# EAGLE board pico-glitcher-v1 v87 (EAGLE 9.7.0)
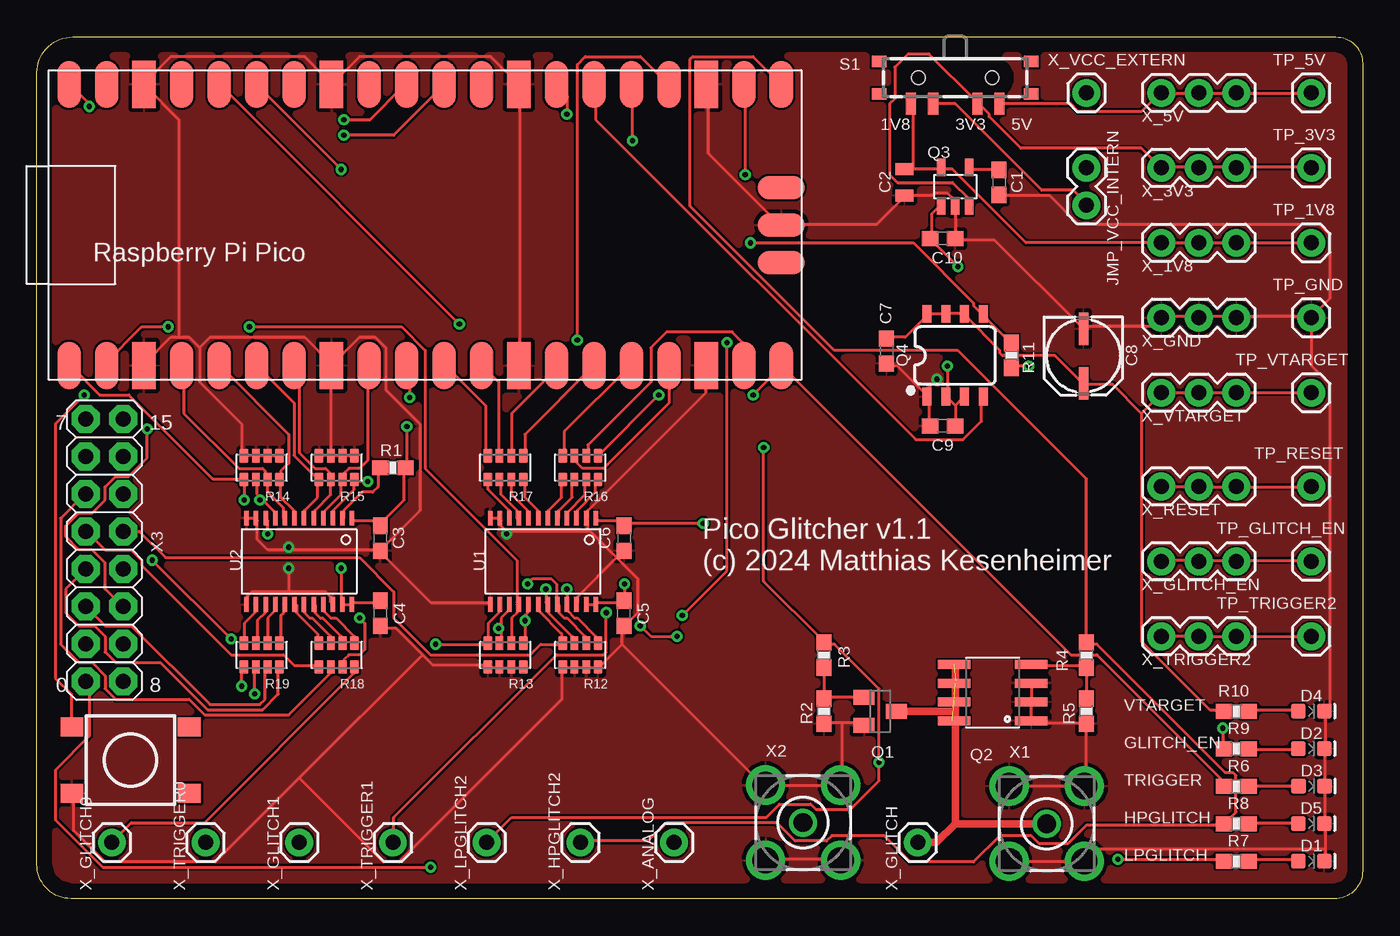
[diagram p0: board, top side]
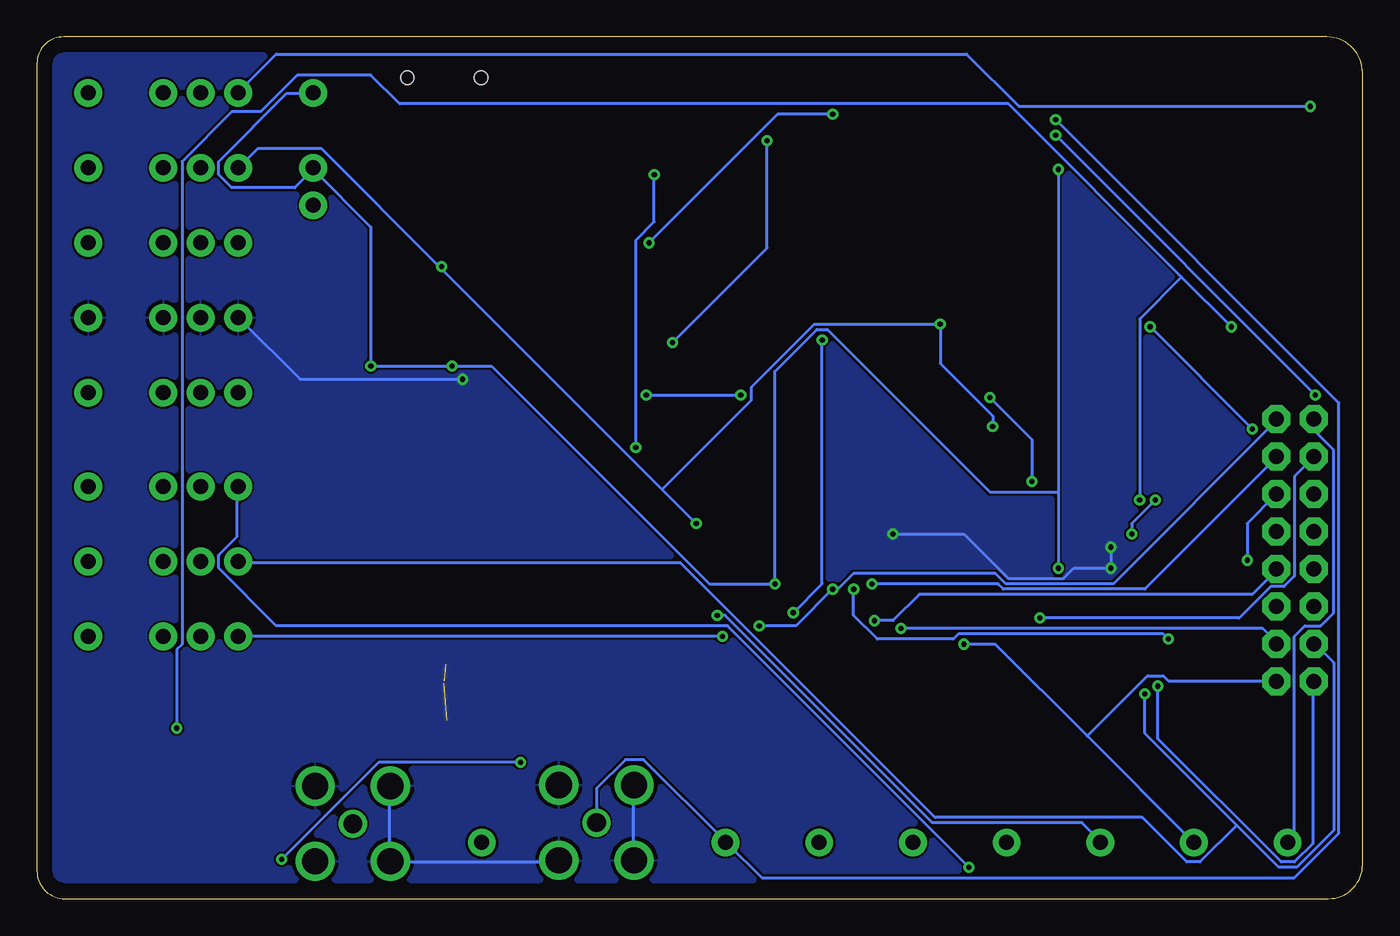
[diagram p1: board, bottom side, seen from below]

Size 89.84 x 58.41 mm. Coordinates in mm from the lower left corner, seen from the top.
Outline: 0,55.98 arc-90 2.43,58.41 88.04,58.41 arc-90 89.84,56.61 89.84,1.89 arc-90 87.95,0 2.32,0 arc-90 0,2.32 0,55.98
Copper layers (1*16): Top / Bottom
Stack-up Default Layer Stack: Top User Defined 0.035mm / Dielectric-1 User Defined 1.5mm / Bottom User Defined 0.035mm
Design rules: minimum drill size 0.35mm, minimum copper width 8mil, keepout clearance 0mil, drill distance 6mil, via restrict clearance 0mil, dimension clearance 40mil, restrict clearance 0mil, copper clearance wire_polygon to wire_polygon 6mil, copper clearance wire_polygon to pad_smd 6mil, copper clearance wire_polygon to via 6mil, copper clearance pad_smd to pad_smd 6mil, copper clearance pad_smd to via 6mil, copper clearance via to via 6mil, copper clearance smd to pad (same net) 6mil, copper clearance smd to via (same net) 6mil, copper clearance smd to smd (same net) 6mil

## Footprints (pad centres in the part's own frame; a part is rotated, then mirrored left to right if it is on the bottom)
0603 = smd 1.1 x 1: 1 -0.85,0; 2 0.85,0
0805 = smd 0.8 x 1.2: 1 -0.9,0; 2 0.9,0
PANASONIC_C = smd 2.2 x 0.65: + 1.9,-0.2; - -1.8,-0.2
LED-0603 = smd 1 x 1: A -0.877,0; C 0.877,0
1X02 = drill 1.016 pad 1.88: 1 0,0; 2 2.54,0
RPI_PICO = smd 3.2 x 1.6: 3V3 9.525,13.97; 3V3_EN 9.525,16.51; ADC_VREF 9.525,11.43; AGND 9.525,6.35; GND@1 -9.525,19.05; GND@2 -9.525,6.35; GND@3 -9.525,-6.35; GND@4 -9.525,-19.05; GND@6 9.525,-19.05; GND@7 9.525,-6.35; GND@8 9.525,19.05; GP0 -9.525,24.13; GP1 -9.525,21.59; GP2 -9.525,16.51; GP3 -9.525,13.97; GP4 -9.525,11.43; GP5 -9.525,8.89; GP6 -9.525,3.81; GP7 -9.525,1.27; GP8 -9.525,-1.27; GP9 -9.525,-3.81; GP10 -9.525,-8.89; GP11 -9.525,-11.43; GP12 -9.525,-13.97; GP13 -9.525,-16.51; GP14 -9.525,-21.59; GP15 -9.525,-24.13; GP16 9.525,-24.13; GP17 9.525,-21.59; GP18 9.525,-16.51; GP19 9.525,-13.97; GP20 9.525,-11.43; GP21 9.525,-8.89; GP22 9.525,-3.81; GP26_A0 9.525,1.27; GP27_A1 9.525,3.81; GP28_A2 9.525,8.89; RUN 9.525,-1.27; VBUS 9.525,24.13; VSYS 9.525,21.59 | smd 1.6 x 3.2: GND@5 0,-24.13; SWCLK -2.54,-24.13; SWDIO 2.54,-24.13
SOT23 = smd 1 x 1.4: 1 -0.95,-1.1; 2 0.95,-1.1; 3 0,1.1
SO08 = smd 0.61 x 2.21: 1 -1.905,-2.616; 2 -0.635,-2.616; 3 0.635,-2.616; 4 1.905,-2.616; 5 1.905,2.616; 6 0.635,2.616; 7 -0.635,2.616; 8 -1.905,2.616
SOT23-5L = smd 0.55 x 1.2: 1 -0.95,-1.3; 2 0,-1.3; 3 0.95,-1.3; 4 0.95,1.3; 5 -0.95,1.3
SO08' = smd 0.6 x 1.2: 1 -1.905,-2.8; 2 -0.635,-2.8; 3 0.635,-2.8; 4 1.905,-2.8; 5 1.905,2.8; 6 0.635,2.8; 7 -0.635,2.8; 8 -1.905,2.8
0603-RES = smd 1.1 x 1: 1 -0.85,0; 2 0.85,0
742C083103JP = smd 0.59 x 0.92: 1 -1.2,-0.8; 2 -0.4,-0.8; 3 0.4,-0.8; 4 1.2,-0.8; 5 1.2,0.8; 6 0.4,0.8; 7 -0.4,0.8; 8 -1.2,0.8
SWITCH-SP3T-SMD = smd 0.7 x 1.5: 1 3,-1.75; 2 1.5,-1.75; 3 -1.5,-1.75; 4 -3,-1.75 | smd 1 x 0.8: P$1 -5.15,-1.1; P$2 -5.15,1.1; P$3 5.15,1.1; P$4 5.15,-1.1 | hole 0.9: 2.5,0; -2.5,0
TACTILE_SWITCH_TALL = smd 1.55 x 1.3: A1 -3.975,-2.25; A2 3.975,-2.25; B1 -3.975,2.25; B2 3.975,2.25
1X01 = drill 1.016 pad 1.88: 1 0,0
TSSOP24 = smd 0.305 x 0.991: 1 -3.575,-2.918; 2 -2.925,-2.918; 3 -2.275,-2.918; 4 -1.625,-2.918; 5 -0.975,-2.918; 6 -0.325,-2.918; 7 0.325,-2.918; 8 0.975,-2.918; 9 1.625,-2.918; 10 2.275,-2.918; 11 2.925,-2.918; 12 3.575,-2.918; 13 3.575,2.918; 14 2.925,2.918; 15 2.275,2.918; 16 1.625,2.918; 17 0.975,2.918; 18 0.325,2.918; 19 -0.325,2.918; 20 -0.975,2.918; 21 -1.625,2.918; 22 -2.275,2.918; 23 -2.925,2.918; 24 -3.575,2.918
BU-SMA-V = drill 1.27: 1 0,0 | drill 1.778: 2 -2.55,2.55; 3 2.55,2.55; 4 2.55,-2.55; 5 -2.55,-2.55
2X8 = drill 1.016 pad 1.88 octagon: 1 0,0; 2 0,2.54; 3 2.54,0; 4 2.54,2.54; 5 5.08,0; 6 5.08,2.54; 7 7.62,0; 8 7.62,2.54; 9 10.16,0; 10 10.16,2.54; 11 12.7,0; 12 12.7,2.54; 13 15.24,0; 14 15.24,2.54; 15 17.78,0; 16 17.78,2.54
1X03 = drill 1.016 pad 1.88: 1 0,0; 2 2.54,0; 3 5.08,0

## Placement (x,y rotation side)
C1  0.01uF  [0603]  65.19,48.55 270 top
C2  2.2u  [0805]  58.79,48.55 270 top
C3  0.1uF  [0603]  23.28,24.42 270 top
C4  0.1uF  [0603]  23.28,19.34 90 top
C5  0.1uF  [0603]  39.79,19.34 90 top
C6  0.1uF  [0603]  39.79,24.42 270 top
C7  0.1uF  [0603]  57.57,37.12 270 top
C8  22uF  [PANASONIC_C]  71.12,36.83 270 top
C9  0.1uF  [0603]  61.38,32.04 0 top
C10  0.1uF  [0603]  61.38,44.74 0 top
D1  LED_RED_LPGLITCH  [LED-0603]  86.36,2.54 0 top
D2  LED_BLUE_GLITCH_EN  [LED-0603]  86.36,10.16 0 top
D3  LED_BLUE_TRIGGER2  [LED-0603]  86.37,7.62 0 top
D4  LED_RED_TARGET_POWER  [LED-0603]  86.36,12.7 0 top
D5  LED_RED_HPGLITCH  [LED-0603]  86.36,5.08 0 top
JMP_VCC_INTERN  JMP_VCC_INTERN  [1X02]  71.12,49.53 270 top
PICO  Raspberry Pi  [RPI_PICO]  26.31,45.66 90 top
Q1  IRLML2502  [SOT23]  57.15,12.7 270 top
Q2  IRF7807PBF  [SO08]  64.77,13.97 90 top
Q3  TPS 79318  [SOT23-5L]  62.23,48.26 0 top
Q4  TPS2041  [SO08']  62.23,36.83 0 top
R1  10K  [0603-RES]  24.13,29.21 0 top
R2  10K  [0603-RES]  53.34,12.7 90 top
R3  1R  [0603-RES]  53.34,16.51 90 top
R4  1R  [0603-RES]  71.12,16.51 90 top
R5  10K  [0603-RES]  71.12,12.7 90 top
R6  168  [0603-RES]  81.28,10.16 180 top
R7  168  [0603-RES]  81.28,2.54 180 top
R8  168  [0603-RES]  81.28,7.62 180 top
R9  220  [0603-RES]  81.28,12.7 180 top
R10  168  [0603-RES]  81.28,5.08 180 top
R11  10K  [0603-RES]  66.04,36.83 270 top
R12  10k  [742C083103JP]  36.83,16.51 180 top
R13  10k  [742C083103JP]  31.75,16.51 180 top
R14  10k  [742C083103JP]  15.24,29.21 180 top
R15  10k  [742C083103JP]  20.32,29.21 180 top
R16  100  [742C083103JP]  36.83,29.21 180 top
R17  100  [742C083103JP]  31.75,29.21 180 top
R18  100  [742C083103JP]  20.32,16.51 180 top
R19  100  [742C083103JP]  15.24,16.51 180 top
S1  Micro Slide Switch  [SWITCH-SP3T-SMD]  62.23,55.64 0 top
S_RST  SWITCH-MOMENTARY-2  [TACTILE_SWITCH_TALL]  6.35,9.39 180 top
TP_1V8  PINHDR_1X1  [1X01]  86.36,44.45 0 top
TP_3V3  PINHDR_1X1  [1X01]  86.36,49.53 0 top
TP_5V  M01PTH  [1X01]  86.36,54.61 0 top
TP_GLITCH_EN  PINHDR_1X1  [1X01]  86.36,22.86 0 top
TP_GND  PINHDR_1X1  [1X01]  86.36,39.37 0 top
TP_RESET  PINHDR_1X1  [1X01]  86.36,27.94 0 top
TP_TRIGGER2  PINHDR_1X1  [1X01]  86.36,17.78 0 top
TP_VTARGET  PINHDR_1X1  [1X01]  86.36,34.29 0 top
U1  NH245  [TSSOP24]  34.29,22.86 180 top
U2  NH245  [TSSOP24]  17.78,22.86 180 top
X1  BU-SMA-V  [BU-SMA-V]  68.43,5.08 0 top
X2  BU-SMA-V  [BU-SMA-V]  51.92,5.15 0 top
X3  M08X2  [2X8]  3.3,32.51 270 top
X_1V8  PINHDR_3X1  [1X03]  76.2,44.45 0 top
X_3V3  PINHDR_3X1  [1X03]  76.2,49.53 0 top
X_5V  PINHDR_3X1  [1X03]  76.2,54.61 0 top
X_ANALOG  PINHDR_1X1  [1X01]  43.18,3.81 0 top
X_GLITCH  PINHDR_1X1  [1X01]  59.69,3.81 0 top
X_GLITCH0  PINHDR_1X1  [1X01]  5.08,3.81 0 top
X_GLITCH1  PINHDR_1X1  [1X01]  17.78,3.81 0 top
X_GLITCH_EN  PINHDR_3X1  [1X03]  76.2,22.86 0 top
X_GND  PINHDR_3X1  [1X03]  76.2,39.37 0 top
X_HPGLITCH2  PINHDR_1X1  [1X01]  36.83,3.81 0 top
X_LPGLITCH2  PINHDR_1X1  [1X01]  30.48,3.81 0 top
X_RESET  PINHDR_3X1  [1X03]  76.2,27.94 0 top
X_TRIGGER0  PINHDR_1X1  [1X01]  11.43,3.81 0 top
X_TRIGGER1  PINHDR_1X1  [1X01]  24.13,3.81 0 top
X_TRIGGER2  PINHDR_3X1  [1X03]  76.2,17.78 0 top
X_VCC_EXTERN  PINHDR_1X1  [1X01]  71.12,54.61 0 top
X_VTARGET  PINHDR_3X1  [1X03]  76.2,34.29 0 top

## Library data of the parts
C1 = SparkFun-Capacitors; PROD_ID: CAP-16503; VALUE: 0.1uF
C2 = SparkFun-Capacitors
C3-C7 C9 C10 = SparkFun-Capacitors; PROD_ID: CAP-16503
C8 = SparkFun-Capacitors; PROD_ID: CAP-08618
D1-D5 = SparkFun-LED
JMP_VCC_INTERN TP_1V8 TP_3V3 TP_5V TP_GLITCH_EN TP_GND TP_RESET TP_TRIGGER2 TP_VTARGET X3 X_1V8 X_3V3 X_5V X_ANALOG X_GLITCH X_GLITCH0 X_GLITCH1 X_GLITCH_EN X_GND X_HPGLITCH2 X_LPGLITCH2 X_RESET X_TRIGGER0 X_TRIGGER1 X_TRIGGER2 X_VCC_EXTERN X_VTARGET = SparkFun-Connectors
PICO = RaspberryPi_Pico
Q1 = Transistor; CATEGORY: Transistor; SUB-CATEGORY: MOSFET; TYPE: N-Channel
Q2 S1 S_RST = SparkFun
Q3 = tps769xx
Q4 = TPS2041
R1-R11 = SparkFun-Resistors; PROD_ID: RES-00824
R12-R19 = Resistor Array; CREATED_BY: PCBLayout.com; DIGIKEY_PN: 742C083103JPTR-ND; MANUFACTURER: CTS Resistor Products; MPN: 742C083103JP; PACKAGE: 1206
U1 U2 = TI_NH245_SN74LVC8T245
X1 X2 = con-coax; OC_FARNELL: unknown; OC_NEWARK: unknown

## Nets
+1V8: C2.1 Q3.5 S1.4 TP_1V8.1 X_1V8.1 X_1V8.2 X_1V8.3
+3V3: C3.1 C6.1 C10.1 PICO.3V3 Q3.1 Q3.3 R1.2 S1.2 TP_3V3.1 U1.1 U2.1 X_3V3.1 X_3V3.2 X_3V3.3
+5V: PICO.VBUS S1.1 TP_5V.1 X_5V.1 X_5V.2 X_5V.3
ANALOG: PICO.GP26_A0 X2.1 X_ANALOG.1
GLITCH: Q1.3 Q2.5 Q2.6 Q2.7 Q2.8 X1.1 X_GLITCH.1
GND: C1.2 C2.2 C3.2 C4.1 C5.1 C6.2 C7.2 C8.- C9.1 C10.2 D1.C D2.C D3.C D4.C D5.C PICO.AGND PICO.GND@1 PICO.GND@2 PICO.GND@3 PICO.GND@4 PICO.GND@5 PICO.GND@6 PICO.GND@7 PICO.GND@8 Q1.2 Q2.1 Q2.2 Q2.3 Q3.2 Q4.1 R2.1 R5.1 R12.5 R12.6 R12.7 R12.8 R13.5 R13.6 R13.7 R13.8 R14.1 R14.2 R14.3 R14.4 R15.1 R15.2 R15.3 R15.4 S_RST.B2 TP_GND.1 U1.2 U1.11 U1.12 U1.13 U1.22 U2.11 U2.12 U2.13 U2.22 X1.2 X1.3 X1.4 X1.5 X2.2 X2.3 X2.4 X2.5 X_GND.1 X_GND.2 X_GND.3
GP0: PICO.GP0 R14.5 U2.10
GP1: PICO.GP1 R6.2 R14.6 U2.9
GP2: PICO.GP2 R14.7 U2.8
GP3: PICO.GP3 R14.8 U2.7
GP4: PICO.GP4 R15.5 U2.6
GP5: PICO.GP5 R15.6 U2.5
GP6: PICO.GP6 R15.7 U2.4
GP7: PICO.GP7 R15.8 U2.3
GP8: PICO.GP8 R17.4
GP9: PICO.GP9 R17.3
GP10: PICO.GP10 R17.2
GP11: PICO.GP11 R17.1
GP12: PICO.GP12 R16.4
GP13: PICO.GP13 R16.3
GP14: PICO.GP14 R16.2
GP15: PICO.GP15 R8.2 R16.1
HPGLITCH2: PICO.GP16 R4.2 R10.2 X_HPGLITCH2.1
JVCC: JMP_VCC_INTERN.2 S1.3
LPGLITCH2: PICO.GP17 R3.2 R7.2 X_LPGLITCH2.1
N$1: D3.A R8.1
N$2: D1.A R7.1
N$3: Q1.1 R2.2 R3.1
N$4: D2.A R6.1
N$5: Q2.4 R4.1 R5.2
N$6: D4.A R9.1
N$7: D5.A R10.1
N$8: C1.1 Q3.4
N$9: R18.1 U2.21
N$10: R18.2 U2.20
N$11: R18.3 U2.19
N$12: R18.4 U2.18
N$13: R19.1 U2.17
N$14: R19.2 U2.16
N$15: R19.3 U2.15
N$16: R19.4 U2.14
N$17: R16.8 U1.3
N$18: R16.7 U1.4
N$19: R16.6 U1.5
N$20: R16.5 U1.6
N$21: R17.8 U1.7
N$22: R17.7 U1.8
N$23: R17.6 U1.9
N$24: R17.5 U1.10
N$26: R12.1 TP_TRIGGER2.1 U1.21 X3.2 X_TRIGGER2.1 X_TRIGGER2.2 X_TRIGGER2.3
N$33: R1.1 U2.2
N$34: PICO.RUN S_RST.A2
N$37: PICO.GP19 X_GLITCH1.1
N$38: R19.5 TP_RESET.1 X3.15 X_RESET.1 X_RESET.2 X_RESET.3
N$39: R19.6 TP_GLITCH_EN.1 X3.13 X_GLITCH_EN.1 X_GLITCH_EN.2 X_GLITCH_EN.3
N$40: R19.7 X3.11
N$41: R19.8 X3.9
N$42: R18.5 X3.7
N$43: R18.6 X3.5
N$44: R18.7 X3.3
N$45: R18.8 X3.1 X_GLITCH0.1
N$47: R12.2 U1.20 X3.4
N$48: R12.3 U1.19 X3.6
N$49: R12.4 U1.18 X3.8
N$50: R13.1 U1.17 X3.10
N$51: R13.2 U1.16 X3.12
N$52: R13.3 U1.15 X3.14
N$53: R13.4 U1.14 X3.16 X_TRIGGER0.1
N$54: PICO.GP18 X_TRIGGER1.1
VCC: C4.2 C5.2 C9.2 JMP_VCC_INTERN.1 PICO.ADC_VREF Q4.2 Q4.3 R11.2 U1.23 U1.24 U2.23 U2.24 X_VCC_EXTERN.1
VTARGET: C7.1 C8.+ Q4.6 Q4.7 Q4.8 R9.2 TP_VTARGET.1 X_VTARGET.1 X_VTARGET.2 X_VTARGET.3
VTARGET_EN: PICO.GP20 Q4.4
VTARGET_OC: PICO.GP21 Q4.5 R11.1

## Tracks (layer width: path | path; a pad name or v marks a point on that pad's centre or on a via)
+1V8
  Top 0.203: 59.38,49.43 61.16,49.43 Q3.5 61.34,49.43 62.05,49.43 67.03,44.45 X_1V8.1 X_1V8.2 X_1V8.3 TP_1V8.1 | 59.38,49.43 58.85,49.43 C2.1 59.38,49.43 | 59.38,49.43 59.38,53.87 S1.4
+3V3  (via drill 0.35)
  Top 0.203: Q3.3 63.12,47.12 63.12,47.47 62.05,48.54 58.32,48.54 57.78,49.07 57.78,53.87 58.14,54.23 58.14,56.36 59.03,57.25 60.45,57.25 63.65,54.05 S1.2 63.83,53.87 64.54,53.16 64.54,52.98 66.67,50.85 74.85,50.85 76.1,49.61 X_3V3.1 76.28,49.61 78.59,49.61 X_3V3.2 78.77,49.61 81.25,49.61 X_3V3.3 81.43,49.61 86.23,49.61 TP_3V3.1 | U2.1 21.34,25.6 22.94,25.6 23.11,25.43 C3.1 23.29,25.43 24.89,27.03 24.89,29.16 R1.2 25.07,29.34 v25.07,32 | Q3.1 61.16,46.94 60.63,46.41 60.63,44.81 C10.1 60.63,44.63 v62.41,42.85 | U1.1 37.87,25.6 39.47,25.6 39.65,25.43 C6.1 39.83,25.43 v45.16,25.43 | v28.63,38.94 12.45,55.12 PICO.3V3
  Bottom 0.203: 62.59,42.85 70.59,50.85 74.85,50.85 76.1,49.61 X_3V3.1 | 62.59,42.85 47.47,27.74 | 47.47,27.74 v45.16,25.43 | 62.59,42.85 v62.41,42.85 | 47.47,27.74 41.43,33.78 41.43,34.67 37.16,38.94 v28.63,38.94 28.63,36.27 25.07,32.72 v25.07,32
+5V  (via drill 0.35)
  Top 0.203: S1.1 65.25,53.87 70.05,53.87 70.59,53.34 74.85,53.34 76.1,54.59 X_5V.1 76.28,54.59 78.59,54.59 X_5V.2 78.77,54.59 81.25,54.59 X_5V.3 81.43,54.59 86.23,54.59 TP_5V.1 | v3.56,53.7 3.56,53.87 2.31,55.12 PICO.VBUS
  Bottom 0.203: v3.56,53.7 23.29,53.7 26.85,57.25 73.61,57.25 76.1,54.76 X_5V.1
ANALOG  (via drill 0.35)
  Top 0.203: v20.8,52.81 22.58,52.81 24.89,55.12 PICO.GP26_A0
  Bottom 0.203: v20.8,52.81 1.6,33.6 1.6,4.45 4.62,1.42 40.72,1.42 43.03,3.73 X_ANALOG.1 43.2,3.91 48.72,9.42 49.96,9.42 51.92,7.47 X2.1
GLITCH  (3 unrouted)
  Top 0.203: 62.23,14.76 Q2.6 62.23,14.58 | 62.23,15.82 Q2.5 | 58.32,12.8 Q1.3 | 62.05,13.34 Q2.7 62.23,13.34 | 62.05,12.09 Q2.8 | 68.28,5.16 X1.1
  Top 0.508: Q1.3 62.23,12.7 | 62.23,12.7 62.23,15.82 | 62.23,12.7 62.23,5.08 | 62.23,5.08 60.96,3.81 X_GLITCH.1 | X1.1 62.23,5.08
GND  (via drill 0.35)
  Top 0.203: C1.2 65.25,47.65 68.63,47.65 70.59,45.7 86.94,45.7 87.66,44.98 87.66,40.72 86.41,39.47 TP_GND.1 | PICO.GND@6 45.52,55.12 45.52,50.49 50.32,45.7 PICO.GND@5 50.49,45.7 56.9,45.7 58.67,47.47 C2.2 58.85,47.65 60.63,47.65 60.81,47.83 61.7,47.83 62.23,47.3 Q3.2 C10.2 62.23,44.63 64.9,44.63 70.76,38.76 C8.- 70.94,38.76 75.56,38.76 76.1,39.29 X_GND.1 76.28,39.47 78.59,39.47 X_GND.2 78.77,39.47 81.25,39.47 X_GND.3 81.43,39.47 86.23,39.47 TP_GND.1 | C9.1 60.45,32.18 60.45,33.96 Q4.1 | 60.1,34.31 60.27,34.14 Q4.1 | 60.1,34.31 58.32,36.09 57.61,36.09 C7.2 | v60.98,35.2 60.1,34.31 | 60.1,34.31 Q4.1 | 17.07,20.8 19.56,20.8 19.91,20.45 19.91,20.09 U2.22 | 17.07,20.8 14.58,20.8 14.22,20.45 14.22,20.09 U2.13 | U2.12 14.22,25.78 14.76,25.78 U2.11 14.94,25.6 14.94,24.36 15.65,23.65 17.07,23.65 | U1.13 30.58,20.09 26.67,20.09 23.29,23.47 C3.2 | 17.07,23.65 23.11,23.65 C3.2 | v17.07,22.4 17.07,20.8 | 17.07,23.65 v17.07,23.82 | 19.91,30.05 19.2,30.05 R15.4 | R15.1 21.51,30.05 20.8,30.05 R15.2 20.62,30.05 20.09,30.05 R15.3 19.91,30.05 | 19.91,30.05 19.91,36.09 PICO.GND@2 | R14.1 16.36,30.05 15.65,30.05 R14.2 15.47,30.05 14.94,30.05 R14.3 14.76,30.05 14.05,30.05 R14.4 13.87,30.05 13.87,32.18 11.02,35.03 11.02,37.34 | 11.02,37.34 10.31,38.05 9.6,38.05 | 9.6,38.05 9.07,38.05 7.29,36.27 PICO.GND@1 | 11.02,37.34 11.73,38.05 18.14,38.05 19.91,36.27 PICO.GND@2 | C3.2 23.29,23.65 25.96,26.31 25.96,32.18 23.65,34.49 23.65,37.34 22.94,38.05 21.87,38.05 20.09,36.27 PICO.GND@2 | PICO.GND@3 32.72,36.27 32.72,55.12 PICO.GND@7 32.54,55.3 30.76,57.07 21.87,57.07 20.09,55.3 PICO.AGND 19.91,55.3 18.14,57.07 9.07,57.07 7.29,55.3 PICO.GND@8 7.29,55.12 9.6,52.81 9.6,38.05
  Top 0.203: R13.8 32.89,15.65 32.18,15.65 R13.7 32,15.65 31.47,15.65 R13.6 31.29,15.65 30.58,15.65 R13.5 30.4,15.82 26.85,15.82 26.14,16.54 | 26.14,16.54 24.36,18.31 23.29,18.31 C4.1 | 26.14,16.54 17.78,8.18 | 17.78,8.18 12.09,2.49 4.62,2.49 2.49,4.62 2.49,7.11 S_RST.B2 | 39.65,17.25 39.65,18.31 C5.1 39.83,18.49 40.72,19.38 40.72,21.69 39.29,23.11 | 39.65,17.25 38.05,15.65 R12.8 37.87,15.65 37.34,15.65 R12.7 37.16,15.65 36.45,15.65 R12.6 36.27,15.65 35.74,15.65 R12.5 35.56,15.65 35.56,13.51 24.54,2.49 23.47,2.49 17.78,8.18 | U1.12 30.76,25.78 31.29,25.78 U1.11 31.47,25.6 31.47,25.25 31.83,24.89 | 39.29,23.11 39.65,23.47 C6.2 39.29,23.11 | 39.29,23.11 36.63,20.45 36.63,20.09 U1.22 | 39.29,23.11 37.52,24.89 | 37.52,24.89 37.34,25.07 37.34,25.6 U1.2 37.34,25.78 37.34,26.31 45.34,34.31 45.34,36.09 PICO.GND@4 | 37.52,24.89 31.83,24.89 | X2.5 49.43,2.67 54.41,2.67 X2.4 | 54.59,11.91 56.01,11.91 Q1.2 | 54.59,11.91 53.34,11.91 R2.1 | 54.59,11.91 54.59,7.82 X2.3 54.41,7.64 49.43,7.64 X2.2 49.25,7.64 39.65,17.25 | Q2.3 Q2.2 Q2.1 67.39,11.91 71.12,11.91 R5.1 71.12,7.64 X1.3 70.94,7.64 65.96,7.64 X1.2 | 87.3,3.38 87.3,4.98 D5.C 87.3,5.16 87.3,7.47 D3.C 87.3,7.64 87.3,10.13 D2.C 87.3,10.31 87.3,12.62 D4.C 87.3,12.8 87.66,13.16 87.66,34.85 86.41,36.09 86.41,39.29 TP_GND.1 | 87.3,3.38 87.3,2.67 D1.C | 87.3,3.38 71.83,3.38 71.12,2.67 X1.4 70.94,2.49 65.96,2.49 X1.5 | 31.83,24.89 v31.83,24.71
  Bottom 0.203: v60.98,35.2 72.01,35.2 76.1,39.29 X_GND.1 | v17.07,23.82 v17.07,22.4 19.56,22.4 20.27,21.69 24,21.69 27.03,24.71 v31.83,24.71 | X2.5 49.43,2.67 49.43,7.64 X2.2 | X1.2 65.96,7.47 65.96,2.67 X1.5 65.79,2.49 54.59,2.49 X2.4
  pour Top: 0,58.42 90.17,58.42 90.17,0 0,0
  pour Bottom: 0,58.42 90.17,58.42 90.17,0 0,0
GP0  (via drill 0.35)
  Top 0.203: PICO.GP0 2.31,36.09 4.27,34.14 6.22,34.14 11.91,28.45 13.87,28.45 R14.5 14.05,28.27 v14.05,27.03 | v15.65,24.71 15.65,25.6 U2.10
  Bottom 0.203: v15.65,24.71 15.65,25.43 v14.05,27.03
GP1  (via drill 0.35)
  Top 0.203: 15.29,27.03 16.18,26.14 16.18,25.78 U2.9 | 15.29,27.03 14.94,27.38 14.94,28.27 R14.6 | v80.37,11.56 80.37,10.31 R6.2 | v8.89,38.76 7.11,38.76 4.62,36.27 PICO.GP1 | v15.11,27.03 15.29,27.03
  Bottom 0.203: v80.37,11.56 80.37,16.89 80.01,17.25 80.01,49.96 76.63,53.34 74.68,53.34 72.19,55.83 67.21,55.83 65.25,53.87 24,53.87 12.27,42.14 | v8.89,38.76 12.27,42.14 | v15.11,27.03 15.11,39.29 12.27,42.14
GP2
  Top 0.203: U2.8 16.71,25.78 16.71,26.49 15.65,27.56 15.65,28.27 R14.7 15.47,28.45 15.47,28.98 15.29,29.16 13.69,29.16 9.96,32.89 9.96,36.09 PICO.GP2
GP3
  Top 0.203: U2.7 17.42,25.78 17.42,26.31 16.54,27.2 16.54,28.27 R14.8 16.54,28.45 16.54,28.98 17.07,29.52 17.07,31.47 12.45,36.09 PICO.GP3
GP4
  Top 0.203: U2.6 18.14,25.78 18.14,26.31 19.02,27.2 19.02,28.27 R15.5 19.02,28.45 17.42,30.05 17.42,33.6 14.94,36.09 PICO.GP4
GP5
  Top 0.203: U2.5 18.85,25.78 18.85,26.31 19.91,27.38 19.91,28.27 R15.6 19.91,28.45 19.91,28.8 19.56,29.16 18.85,29.16 17.78,30.23 17.78,35.74 17.42,36.09 PICO.GP5
GP6
  Top 0.203: U2.4 19.38,25.78 19.38,26.14 20.62,27.38 20.62,28.27 R15.7 20.8,28.45 20.8,28.8 21.16,29.16 21.87,29.16 22.4,29.69 22.4,36.09 PICO.GP6
GP7  (via drill 0.35)
  Top 0.203: U2.3 20.09,25.78 20.09,26.31 21.51,27.74 21.51,28.27 R15.8 21.69,28.27 v22.4,28.27 | v25.25,33.96 25.25,35.92 25.07,36.09 PICO.GP7
  Bottom 0.203: v22.4,28.27 22.4,31.11 v25.25,33.96
GP8
  Top 0.203: R17.4 30.4,30.05 30.4,33.43 27.74,36.09 PICO.GP8
GP9
  Top 0.203: R17.3 31.29,30.05 31.29,35.03 30.23,36.09 PICO.GP9
GP10
  Top 0.203: R17.2 32.18,30.05 32.18,32.89 35.03,35.74 35.03,36.09 PICO.GP10
GP11
  Top 0.203: R17.1 33.07,30.05 33.07,31.47 37.69,36.09 PICO.GP11
GP12
  Top 0.203: R16.4 35.74,30.05 35.74,31.65 40.18,36.09 PICO.GP12
GP13
  Top 0.203: R16.3 36.45,29.87 36.45,29.69 36.98,29.16 38.41,29.16 42.85,33.6 42.85,36.09 PICO.GP13
GP14
  Top 0.203: R16.2 37.34,30.05 37.34,30.76 41.6,35.03 41.6,37.34 42.67,38.41 47.12,38.41 47.83,37.69 47.83,36.27 PICO.GP14
GP15  (via drill 0.35)
  Top 0.203: v42.14,34.14 38.05,30.05 R16.1 | 50.49,36.09 v48.54,34.14 | 50.49,36.09 70.05,16.54 71.83,16.54 80.37,8 80.37,7.64 R8.2 | 50.49,36.09 PICO.GP15
  Bottom 0.203: v48.54,34.14 v42.14,34.14
HPGLITCH2
  Top 0.203: PICO.GP16 50.32,55.3 48.54,57.07 44.45,57.07 44.27,56.9 44.27,46.94 54.05,37.16 62.41,37.16 71.12,28.45 R4.2 71.12,17.25 71.83,17.25 80.54,8.53 81.08,8.53 81.25,8.36 81.25,5.87 80.54,5.16 R10.2 80.37,4.98 71.12,4.98 69.88,3.73 67.92,3.73 67.39,4.27 65.25,4.27 63.48,2.49 59.21,2.49 57.43,4.27 53.87,4.27 53.52,3.91 51.38,3.91 50.14,5.16 42.67,5.16 41.43,3.91 36.98,3.91 X_HPGLITCH2.1
JVCC
  Top 0.203: S1.3 60.81,53.87 62.23,53.87 68.1,48.01 70.23,48.01 71.12,47.12 JMP_VCC_INTERN.2
LPGLITCH2  (via drill 0.35)
  Top 0.203: X_LPGLITCH2.1 32.18,5.51 49.43,5.51 50.32,6.4 52.45,6.4 52.81,6.04 55.12,6.04 57.07,8 v57.07,9.25 57.07,14.22 54.05,17.25 53.34,17.25 R3.2 53.34,17.42 49.25,21.51 v49.25,30.58 | v73.25,2.67 80.37,2.67 R7.2 | v48.01,49.07 48.01,55.12 PICO.GP17
  Bottom 0.203: v73.25,2.67 66.67,9.25 v57.07,9.25 | v48.01,49.07 48.01,45.87 49.25,44.63 v49.25,30.58
N$1
  Top 0.203: D3.A 85.34,7.64 82.14,7.64 R8.1
N$2
  Top 0.203: D1.A 85.34,2.67 82.14,2.67 R7.1
N$3
  Top 0.203: R3.1 53.34,13.69 | 53.34,13.69 56.01,13.69 Q1.1 | 53.34,13.69 R2.2
N$4
  Top 0.203: D2.A 85.34,10.13 82.14,10.13 R6.1
N$5
  Top 0.203: R5.2 R4.1 71.12,15.82 67.39,15.82 Q2.4
N$6
  Top 0.203: D4.A 85.34,12.8 82.14,12.8 R9.1
N$7
  Top 0.203: D5.A 85.34,5.16 82.14,5.16 R10.1
N$8
  Top 0.203: C1.1 65.08,49.43 63.3,49.43 Q3.4
N$9
  Top 0.203: R18.1 21.51,17.42 21.51,17.78 20.27,19.02 19.91,19.02 19.38,19.56 19.38,19.91 U2.21
N$10
  Top 0.203: R18.2 20.62,17.42 20.62,17.78 19.38,19.02 19.2,19.02 18.85,19.38 18.85,19.91 U2.20
N$11
  Top 0.203: R18.3 19.91,17.42 19.91,17.78 18.67,19.02 18.49,19.02 18.14,19.38 18.14,19.91 U2.19
N$12
  Top 0.203: R18.4 19.02,17.42 19.02,17.96 17.6,19.38 17.6,19.91 U2.18
N$13
  Top 0.203: R19.1 16.54,17.42 16.54,19.2 16.71,19.38 16.71,19.91 U2.17
N$14
  Top 0.203: R19.2 15.65,17.42 15.65,19.02 16.18,19.56 16.18,19.91 U2.16
N$15
  Top 0.203: R19.3 14.94,17.42 14.94,18.85 15.47,19.38 15.47,19.91 U2.15
N$16
  Top 0.203: R19.4 14.05,17.42 14.05,18.67 14.76,19.38 14.76,19.91 U2.14
N$17
  Top 0.203: R16.8 37.87,28.27 37.87,27.56 36.63,26.31 36.63,25.78 U1.3
N$18
  Top 0.203: R16.7 37.16,28.27 37.16,27.38 35.92,26.14 U1.4
N$19
  Top 0.203: R16.6 36.27,28.27 36.27,27.2 35.38,26.31 35.38,25.78 U1.5
N$20
  Top 0.203: R16.5 35.56,28.27 35.56,27.2 34.67,26.31 34.67,25.78 U1.6
N$21
  Top 0.203: R17.8 33.07,28.27 33.07,27.2 33.96,26.31 U1.7
N$22
  Top 0.203: R17.7 32.18,28.27 32.18,27.38 33.25,26.31 33.25,25.78 U1.8
N$23
  Top 0.203: R17.6 31.47,28.27 31.47,27.38 32.54,26.31 32.54,25.78 U1.9
N$24
  Top 0.203: R17.5 30.58,28.27 30.58,27.74 32,26.31 32,25.78 U1.10
N$26  (via drill 0.35)
  Top 0.203: X_TRIGGER2.1 X_TRIGGER2.2 X_TRIGGER2.3 TP_TRIGGER2.1 | R12.1 37.87,17.42 37.87,17.78 36.63,19.02 36.45,19.02 35.92,19.56 35.92,19.91 U1.21 35.92,20.09 v35.92,20.98 | v43.38,17.78 41.6,17.78 v40.89,18.49
  Bottom 0.203: X3.2 5.87,32.36 16.89,21.34 24.18,21.34 24.89,22.05 34.49,22.05 35.56,20.98 v35.92,20.98 38.41,18.49 v40.89,18.49 | v43.38,17.78 X_TRIGGER2.1
N$33
  Top 0.203: U2.2 20.8,25.78 20.8,26.31 22.05,27.56 22.76,27.56 23.11,27.91 23.11,29.16 R1.1
N$34  (via drill 0.35)
  Top 0.203: v3.2,34.14 1.25,32.18 1.25,14.94 2.31,13.87 2.31,11.73 S_RST.A2 | v20.8,51.74 24.18,51.74 27.56,55.12 PICO.RUN
  Bottom 0.203: v20.8,51.74 v3.2,34.14
N$37  (via drill 0.35)
  Top 0.203: v40.36,51.38 40.36,55.12 PICO.GP19 | v46.76,37.69 46.76,22.23 v43.74,19.2
  Bottom 0.203: v40.36,51.38 40.36,44.09 v46.76,37.69 | v43.74,19.2 43.2,19.2 29.16,5.16 19.02,5.16 17.78,3.91 X_GLITCH1.1
N$38  (via drill 0.35)
  Top 0.203: X_RESET.1 76.28,27.91 78.59,27.91 X_RESET.2 78.77,27.91 81.25,27.91 X_RESET.3 81.43,27.91 86.23,27.91 TP_RESET.1 | v13.87,14.4 13.87,15.65 R19.5 | v26.67,2.13 4.45,2.13 1.25,5.33 1.25,8.71 3.56,11.02 3.56,14.4 3.38,14.58 X3.15
  Bottom 0.203: v13.87,14.4 13.87,10.85 5.51,2.49 4.62,2.49 3.38,3.73 3.38,14.58 X3.15 | v26.67,2.13 43.03,18.49 73.61,18.49 77.52,22.4 77.52,23.29 76.28,24.54 76.28,27.91 X_RESET.1
N$39  (via drill 0.35)
  Top 0.203: X_GLITCH_EN.1 76.28,22.94 78.59,22.94 X_GLITCH_EN.2 78.77,22.94 81.25,22.94 X_GLITCH_EN.3 81.43,22.94 86.23,22.94 TP_GLITCH_EN.1 | v14.76,13.87 14.76,15.65 R19.6
  Bottom 0.203: v14.76,13.87 14.76,11.2 8.53,4.98 | 8.53,4.98 5.69,2.13 4.45,2.13 1.96,4.62 1.96,16 3.2,17.25 X3.13 | 8.53,4.98 11.02,2.49 11.91,2.49 14.94,5.51 28.98,5.51 46.23,22.76 76.1,22.76 X_GLITCH_EN.1
N$40
  Top 0.203: R19.7 15.47,15.65 15.47,13.51 15.11,13.16 11.73,13.16 6.4,18.49 4.62,18.49 3.38,19.74 X3.11
N$41
  Top 0.203: R19.8 16.36,15.65 16.36,13.87 15.29,12.8 11.56,12.8 8.36,16 5.33,16 4.62,16.71 4.62,17.78 3.91,18.49 2.85,18.49 1.96,19.38 1.96,20.98 3.2,22.23 X3.9
N$42
  Top 0.203: R18.5 19.02,15.82 17.42,15.82 16.71,16.54 13.16,16.54 7.11,22.58 7.11,22.94 6.4,23.65 4.62,23.65 3.38,24.89 X3.7
N$43
  Top 0.203: R18.6 19.91,15.65 19.91,15.29 17.07,12.45 11.38,12.45 10.31,13.51 5.33,13.51 4.62,14.22 4.62,15.11 3.73,16 2.85,16 1.6,17.25 1.6,25.78 3.2,27.38 X3.5
N$44  (via drill 0.35)
  Top 0.203: v21.87,19.02 22.23,18.67 22.23,16.89 21.87,16.54 21.16,16.54 20.8,16.18 20.8,15.82 R18.7
  Bottom 0.203: v21.87,19.02 8.36,19.02 6.22,21.16 5.33,21.16 4.62,21.87 4.62,28.63 3.38,29.87 X3.3
N$45
  Top 0.203: R18.8 21.51,15.65 21.51,15.29 11.38,5.16 6.4,5.16 5.16,3.91 X_GLITCH0.1
  Bottom 0.203: X_GLITCH0.1 4.62,4.27 4.62,17.78 3.91,18.49 2.85,18.49 1.96,19.38 1.96,30.4 3.2,31.65 3.2,32.36 X3.1
N$47  (via drill 0.35)
  Top 0.203: R12.2 37.16,17.42 37.16,17.78 35.92,19.02 35.74,19.02 35.38,19.38 35.38,19.91 U1.20 35.2,20.09 35.2,21.34 34.85,21.69 33.6,21.69 v33.25,21.34
  Bottom 0.203: v33.25,21.34 24.71,21.34 24.36,20.98 14.76,20.98 5.87,29.87 X3.4
N$48  (via drill 0.35)
  Top 0.203: R12.3 36.27,17.42 36.27,17.78 34.67,19.38 34.67,19.91 U1.19 34.49,20.09 v34.49,20.98 | v7.82,22.94 v13.16,17.6
  Bottom 0.203: v34.49,20.98 34.49,19.2 32.89,17.6 27.74,17.6 27.38,17.96 13.51,17.96 v13.16,17.6 | v7.82,22.94 7.82,25.43 5.87,27.38 X3.6
N$49
  Top 0.203: U1.18 33.96,19.91 33.96,19.56 35.56,17.96 35.56,17.42 R12.4 35.56,17.25 34.14,17.25 33.43,16.54 26.67,16.54 24.18,19.02 24.18,20.8 21.87,23.11 8.71,23.11 6.93,24.89 X3.8
N$50  (via drill 0.35)
  Top 0.203: R13.1 33.07,17.42 v33.07,18.85 33.07,19.2 33.25,19.38 33.25,19.91 U1.17
  Bottom 0.203: v33.07,18.85 31.83,18.85 30.05,20.62 7.47,20.62 5.87,22.23 X3.10
N$51  (via drill 0.35)
  Top 0.203: R13.2 32.18,17.42 32.18,19.02 32.54,19.38 32.54,19.91 U1.16 32.54,20.09 32.54,22.94 26.31,29.16 26.31,37.16 24.71,38.76 v14.4,38.76 | v7.47,31.83 7.47,29.87 6.22,28.63 5.33,28.63 4.62,27.91 4.62,27.03 3.73,26.14 2.85,26.14 1.96,25.25 1.96,24.54 2.85,23.65 3.73,23.65 4.62,22.76 4.62,20.98 5.69,19.91 X3.12
  Bottom 0.203: v7.47,31.83 v14.4,38.76
N$52  (via drill 0.35)
  Top 0.203: 31.47,18.31 31.47,19.02 32,19.56 32,19.91 U1.15 | 31.47,18.31 31.47,17.42 R13.3 | v31.29,18.31 31.47,18.31
  Bottom 0.203: v31.29,18.31 6.76,18.31 5.87,17.42 X3.14
N$53  (via drill 0.35)
  Top 0.203: U1.14 31.29,19.91 31.29,19.38 30.58,18.67 30.58,17.42 R13.4 30.4,17.25 v27.03,17.25
  Bottom 0.203: v27.03,17.25 24.89,17.25 18.67,11.02 | 18.67,11.02 11.56,3.91 X_TRIGGER0.1 | 18.67,11.02 14.58,15.11 13.51,15.11 13.16,14.76 5.87,14.76 X3.16
N$54  (via drill 0.35)
  Top 0.203: v36.63,37.87 36.63,56.54 37.16,57.07 40.89,57.07 42.67,55.3 PICO.GP18 | v38.58,19.38 38.58,16.71 38.41,16.54 35.2,16.54 24.18,5.51 24.18,3.91 X_TRIGGER1.1
  Bottom 0.203: v36.63,37.87 36.63,21.34 v38.58,19.38
VCC  (via drill 0.35)
  Top 0.203: C4.2 23.11,20.09 21.34,20.09 U2.24 21.34,19.91 20.8,19.91 U2.23 20.62,20.09 v20.62,22.4 | v20.62,49.43 14.94,55.12 PICO.ADC_VREF | 62.23,33.43 C9.2 | 62.23,33.43 61.7,33.96 Q4.2 61.7,34.14 v61.7,36.09 | 62.23,33.43 62.76,33.96 Q4.3 | U1.23 37.34,19.91 37.87,19.91 U1.24 37.87,20.09 39.65,20.09 C5.2 39.83,20.27 v39.83,21.34 | v67.21,36.09 66.14,36.09 R11.2
  Bottom 0.203: v20.62,49.43 20.62,27.56 | 20.62,27.56 v20.62,22.4 | 71.12,49.43 67.21,45.52 v67.21,36.09 v61.7,36.09 59.03,36.09 44.27,21.34 v39.83,21.34 39.83,35.74 36.98,38.58 36.27,38.58 25.25,27.56 20.62,27.56 | 71.12,49.43 72.36,48.18 76.63,48.18 77.52,49.07 77.52,49.96 72.9,54.59 71.12,54.59 X_VCC_EXTERN.1 | 71.12,49.43 JMP_VCC_INTERN.1
VTARGET
  Top 0.203: C7.1 57.61,38.05 58.85,38.05 60.27,39.47 Q4.8 60.45,39.65 61.52,39.65 Q4.7 61.7,39.65 62.76,39.65 Q4.6 62.94,39.47 65.25,37.16 65.25,36.98 65.43,36.8 68.99,36.8 70.76,35.03 C8.+ 70.94,34.85 72.9,34.85 74.85,32.89 | 74.85,32.89 74.85,17.42 79.48,12.8 80.37,12.8 R9.2 | 74.85,32.89 76.1,34.14 X_VTARGET.1 76.28,34.31 78.59,34.31 X_VTARGET.2 78.77,34.31 81.25,34.31 X_VTARGET.3 81.43,34.31 86.23,34.31 TP_VTARGET.1
VTARGET_EN
  Top 0.203: Q4.4 64.01,33.96 64.01,32.36 62.76,31.11 59.56,31.11 37.87,52.81 37.87,55.12 PICO.GP20
VTARGET_OC  (via drill 0.35)
  Top 0.203: R11.1 65.96,37.69 64.19,39.47 Q4.5 64.01,39.65 63.48,40.18 63.48,40.36 59.38,44.45 v48.36,44.45 | v35.92,53.16 35.92,54.41 35.2,55.12 PICO.GP21
  Bottom 0.203: v48.36,44.45 39.65,53.16 v35.92,53.16

## Text on the board
tNames: 1V8 | 3V3 | 5V | Raspberry Pi Pico | 7 | 15 | Pico Glitcher v1.1 / (c) 2024 Matthias Kesenheimer | 0 | 8 | VTARGET | GLITCH_EN | TRIGGER | HPGLITCH | LPGLITCH